# Altium PCB Amplifier.PcbDoc
Units mm, origin at the board's own origin, x right, y up, seen from the top; angles counter-clockwise.
Board outline 28.7 x 17.21 mm, 2 copper layers (Top Layer, Bottom Layer); 12 components, 11 nets, 40 pads, 11 vias.
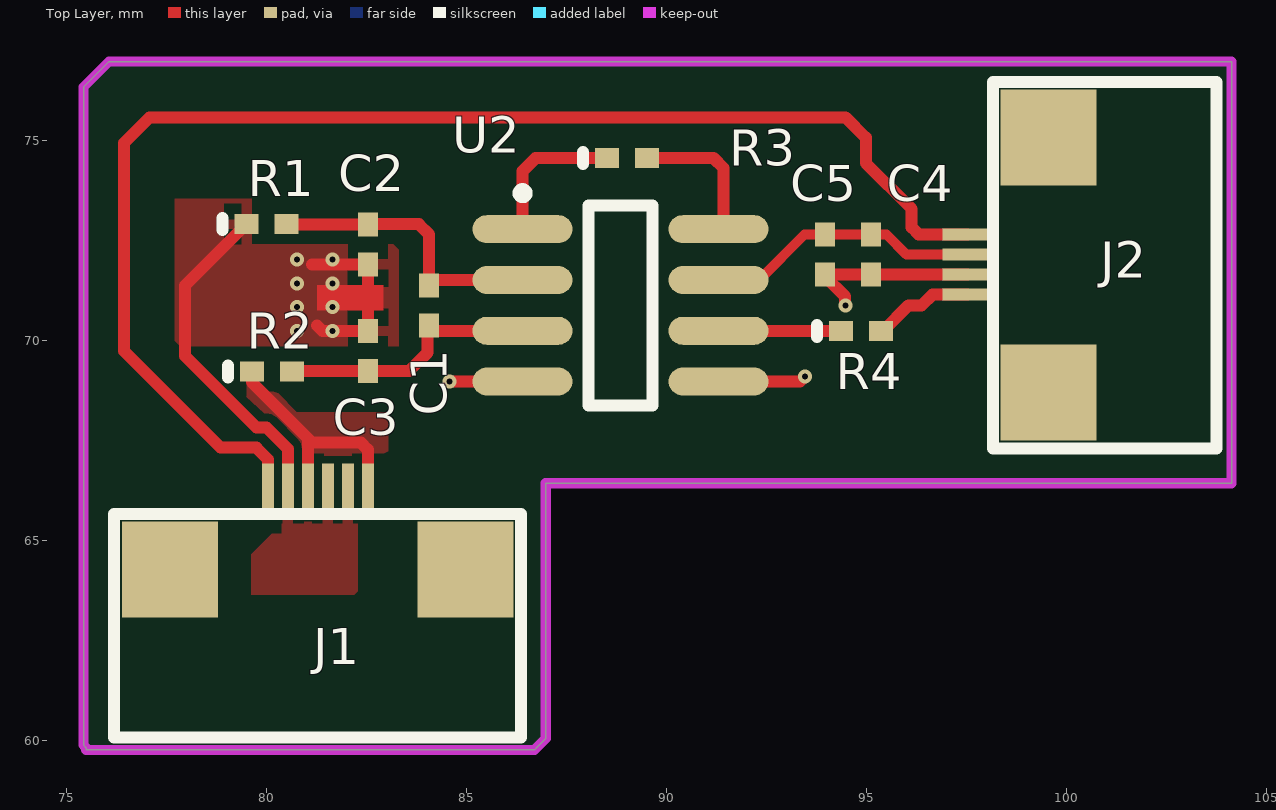
[diagram p0: Top Layer view]
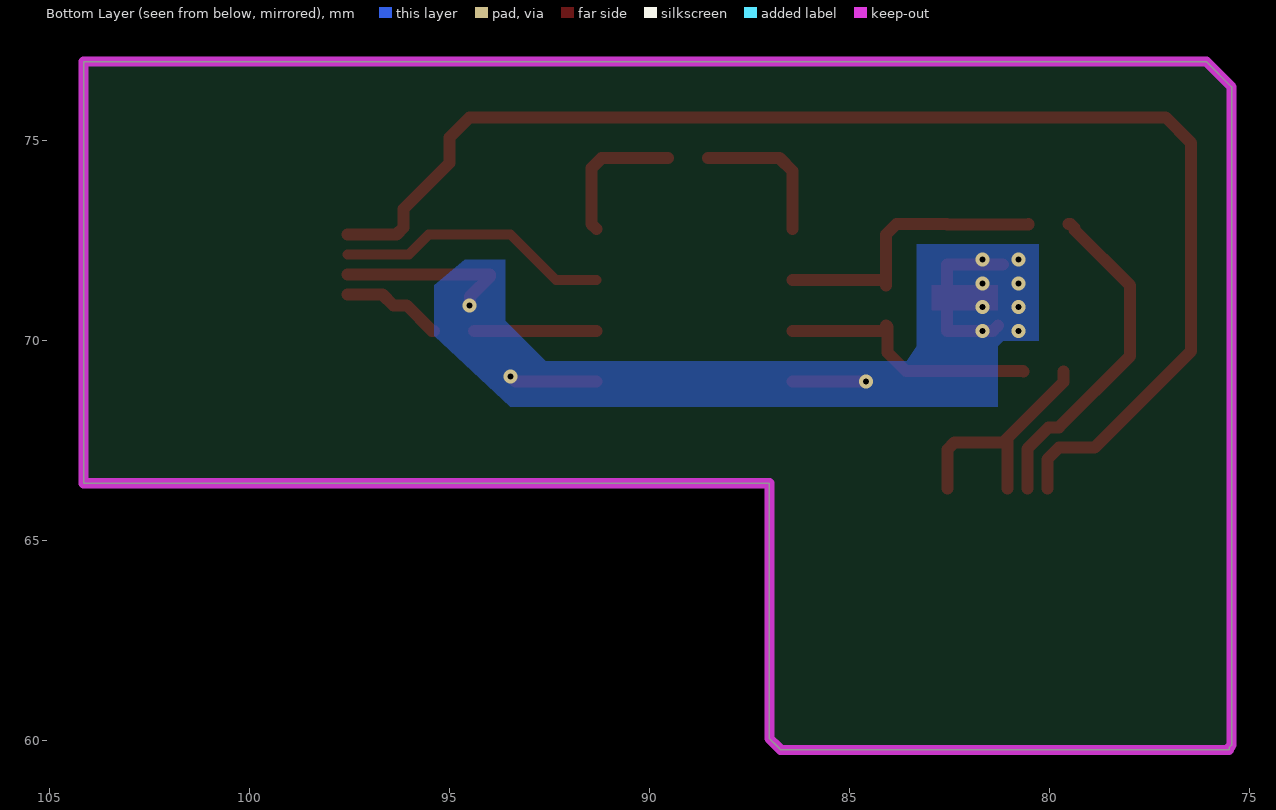
[diagram p1: Bottom Layer view, seen from below]

## Layer stack, top to bottom
Top Solder: solder mask 0.0102, Solder Resist, Dk 3.5
Top Layer: signal copper 0.0356
Dielectric 1: dielectric 0.32, FR-4, Dk 4.8
Bottom Layer: signal copper 0.0356
Bottom Solder: solder mask 0.0102, Solder Resist, Dk 3.5

## Board outline
75.438,59.873 75.501,59.809 75.501,59.753 86.709,59.753 86.773,59.817 86.995,60.039 86.995,66.421 104.14,66.421 104.14,76.962 76.327,76.962 76.073,76.962 75.438,76.327

## Design rules (kind name [scope] priority, off if disabled: settings)
Clearance Clearance_1 [InPolygon] p1: gap=0.2 ignorepadtopadclearanceinfootprint=FALSE
Clearance [All] p2: gap=0.2 ignorepadtopadclearanceinfootprint=FALSE
PolygonConnect [All] p1: thpad.connectstyle=Relief thpad.reliefconductorwidth=0.254 thpad.reliefentries=4 thpad.polygonreliefangle="90 Angle" thpad.airgapwidth=0.254 smdpad.connectstyle=Relief smdpad.reliefconductorwidth=0.254 smdpad.reliefentries=4 smdpad.polygonreliefangle="90 Angle" smdpad.airgapwidth=0.254 via.connectstyle=Direct via.reliefconductorwidth=0.254 via.reliefentries=4 via.polygonreliefangle="90 Angle" via.airgapwidth=0.254
RoutingVias [All] p1: holewidth=0.15 width=0.35 viastyle="Through Hole" minholewidth=0.15 minwidth=0.35 maxholewidth=0.711 maxwidth=1.27
SolderMaskExpansion [All] p1: expansion=0.102
Width [All] p1: maxlimit=0.762 minlimit=0.025 preferedwidth=0.254 minimp=50.000000 maximp=50.000000 favimp=50.000000
30 further rules are at their usual default settings.

## Classes and differential pairs
component class Sheet2: C1 C2 C3 C4 C5 J2 R1 R2 R3 R4 U2

## Components (designator, comment, footprint, x,y, rotation, side; value= is the part's Value field where it differs from the comment)
C1 "1nF" 0402 84.074,70.866 r90 top
C2 "1nF" 0402 82.55,72.39 r90 top
C3 "1nF" 0402 82.55,69.731 r90 top
C4 "0.1nF" 0402 95.123,72.136 r270 top
C5 "10nF" 0402 93.98,72.136 r270 top
J1 "Header 6" 软排线6p 75.32,81.019 r0 top
J2 "Header 4" 软排线4p 99.321,60.951 r90 top
R1 "1K" 0402-A 80.01,72.898 r0 top
R2 "1K" 0402-A 80.145,69.215 r0 top
R3 "10K" 0402-A 89.027,74.549 r0 top
R4 "100R" 0402-A 94.877,70.231 r0 top
U2 "AD623" SO8_M 88.863,70.866 r0 top

## Footprints (in the part's own frame and the unit in brackets; to place one, negate y for a bottom-side part, rotate by r counter-clockwise, add the part's x,y. Pads: shape width x height; smd on the part's side, far side on the other; paste and mask are expansions set on the pad)
0402 [mm] "Chip Capacitor, Body 1.0x0.5mm, IPC High Density"
  rect 0.6x0.5 smd: 1(-0.5,0) 2(0.5,0)
  body extent -0.55,-0.3 0.55,0.3, height 1.3
0402-A [mm] "Chip Inductor, Body 1.0x0.5mm, IPC High Density"
  rect 0.6x0.5 smd: 1(-0.5,0) 2(0.5,0)
  silkscreen extent -1.1,-0.15 -1.1,0.15, body extent -0.55,-0.3 0.55,0.3, height 0.55
SO8_M [mm] "SOIC, 8-Leads, Body 4.9x3.9mm, Pitch 1.27mm, IPC Low Density"
  oval 2.5x0.7 smd: 1(-2.45,1.905) 2(-2.45,0.635) 3(-2.45,-0.635) 4(-2.45,-1.905) 5(2.45,-1.905) 6(2.45,-0.635) 7(2.45,0.635) 8(2.45,1.905)
  silkscreen extent -2.57,-2.5 0.8,2.93, body extent -2,-2.5 2,2.5, height 1.75
软排线4p [mm]
  rect 0.3x1.25 smd: 1(11.688,1.778) 2(11.188,1.778) 3(10.688,1.778) 4(10.188,1.778)
  rect 2.4x2.4 smd: ""(7.738,-0.247) ""(14.106,-0.247)
  silkscreen extent 6.34,-4.44 15.49,1.14
软排线6p [mm]
  rect 0.3x1.25 smd: 1(7.227,-14.732) 2(6.727,-14.732) 3(6.227,-14.732) 4(5.727,-14.732) 5(5.227,-14.732) 6(4.727,-14.732)
  rect 2.4x2.4 smd: ""(2.277,-16.757) ""(9.661,-16.757)
  silkscreen extent 0.88,-20.95 11.05,-15.37

## Part data
C1 C2 C3 C4 C5: library part CAP, "电容"
J1: "Header, 6-Pin", LatestRevisionDate=17-Jul-2002, LatestRevisionNote="Re-released for DXP Platform.", Publisher="Altium Limited"
J2: "Header, 4-Pin", LatestRevisionDate=17-Jul-2002, LatestRevisionNote="Re-released for DXP Platform.", Publisher="Altium Limited"
R1 R2 R3 R4: library part RES, "电阻"
U2: "IC"

## Via types
v1: diameter 0.35, hole 0.15, Top Layer to Bottom Layer, tented both sides, 11 vias

## Nets (pads, with @x,y where several pads share a name; then routed paths per layer and width w, separated by ;. In a path a pad name is that pad's centre, name@x,y a point inside that pad or via, vN(x,y) a via of type N, cw(c..) or ccw(c..) an arc to the next point about the centre after c; other vN are vias at no path point)
NetC1_1: C1.1 C3.1 R2.2 U2.3 | length 6.5
  Top Layer w0.3: R2.2 80.653,69.223 82.542,69.223 C3.1 83.582,69.231 84.036,69.685 84.036,70.328 C1.1 ; C1.1@84.197,70.231 U2.3
NetC1_2: C1.2 C2.2 R1.2 U2.2 | length 7.2
  Top Layer w0.3: R1.2 80.514,72.894 82.546,72.894 C2.2 82.558,72.898 83.82,72.898 84.074,72.644 C1.2 ; C1.2@84.197,71.501 U2.2
NetC2_1: C2.1 C3.2 C4.2 C5.2 J1.2 J1.3 J1.5 J2.3 R1.1 U2.4 U2.5 | length 21.5
  Top Layer w0.3: R1.1 79.46,72.898 79.36,72.798 79.36,72.748 77.978,71.366 77.978,69.596 79.756,67.818 80.01,67.818 80.547,67.281 J1.5 ; 81.153,71.882 81.161,71.89 C2.1 C3.2 v1(81.661,70.231) 81.407,70.231 81.28,70.358 ; v1(84.582,68.961) U2.4 ; U2.5 93.345,68.961 v1(93.472,69.088) ; v1(94.488,70.866) 94.478,70.876 94.478,71.088 93.98,71.586 C5.2 C4.2 95.126,71.639 J2.3
  other v1: 80.772,70.231 80.772,70.824 81.661,70.824 80.772,71.416 81.661,71.416 80.772,72.009 81.661,72.009
NetC4_1: C4.1 C5.1 J2.2 U2.7 | length 6.9
  Top Layer w0.254: U2.7 92.329,71.501 93.464,72.636 C5.1 C4.1 95.512,72.636 96.009,72.139 J2.2
NetJ1_1: J1.1 J1.4 R2.1 | length 6.1
  Top Layer w0.3: R2.1 79.645,68.945 81.047,67.543 ; J1.4 81.047,67.543 ; J1.1 82.547,67.261 82.371,67.437 81.153,67.437 81.047,67.543
NetJ1_6: J1.6 J2.1 | length 33.9
  Top Layer w0.3: J1.6 80.047,67.019 79.756,67.31 78.867,67.31 76.454,69.723 76.454,74.93 77.089,75.565 94.488,75.565 94.996,75.057 94.996,74.422 96.139,73.279 96.139,72.815 96.315,72.639 J2.1
NetJ2_4: J2.4 R4.2 | length 2.5
  Top Layer w0.3: R4.2 95.427,70.231 96.062,70.866 96.393,70.866 96.666,71.139 J2.4
NetR3_1: R3.1 U2.1 | length 3.7
  Top Layer w0.3: U2.1 86.413,74.221 86.741,74.549 R3.1
NetR3_2: R3.2 U2.8 | length 3.6
  Top Layer w0.3: R3.2 91.186,74.549 91.44,74.295 91.44,72.898 U2.8
NetR4_1: R4.1 U2.6 | length 3.1
  Top Layer w0.3: U2.6 R4.1
V-: 
pads on no net: J1. J2.

## Polygon pours and split planes (outlines as drawn)
NetC2_1 on Bottom Layer "Bottom Layer-NetC2_1" (solid, remove dead copper, pour order 4): 80.264,72.39 80.264,72.136 80.264,69.977 81.153,69.977 81.28,69.85 81.28,68.326 93.345,68.326 93.472,68.326 95.377,70.104 95.377,71.374 94.615,72.009 94.488,72.009 93.599,72.009 93.599,70.485 92.583,69.469 83.566,69.469 83.312,69.85 83.312,69.977 83.312,72.39
NetJ1_1 on Top Layer "Top Layer-NetJ1_1" (solid, remove dead copper, pour order 16): 82.804,65.786 83.058,66.04 83.058,68.199 80.772,68.199 80.01,68.961 80.01,69.596 79.121,69.596 79.121,68.961 79.375,68.707 80.899,67.31 80.899,65.786
NetC2_1 on Top Layer "Top Layer-NetC2_1" (solid, remove dead copper, pour order 14): 80.01,72.39 83.185,72.39 83.312,72.263 83.312,69.85 77.851,69.85 77.724,69.977 77.724,73.533 79.756,73.533 80.01,73.279
NetC2_1 on Top Layer "Top Layer-NetC2_1 1" (solid, remove dead copper, pour order 12): 80.391,66.929 80.391,65.151 80.137,65.151 79.629,64.643 79.629,63.627 82.296,63.627 82.296,66.929

## Keep-outs
Keep-Out Layer:
  lines w0.254: 75.438,59.873 75.501,59.809 75.501,59.753 78.359,59.753 84.074,59.753 86.709,59.753 86.773,59.817 86.995,60.039 86.995,66.421 104.14,66.421 104.14,76.962 76.327,76.962 76.073,76.962 75.438,76.327 75.438,59.873

## Other copper
Top Layer:
  region net NetC2_1: 82.931,71.374 82.931,70.739 81.28,70.739 81.28,71.374